# EAGLE board Stepper Driver jig middle (EAGLE 6.6.0)
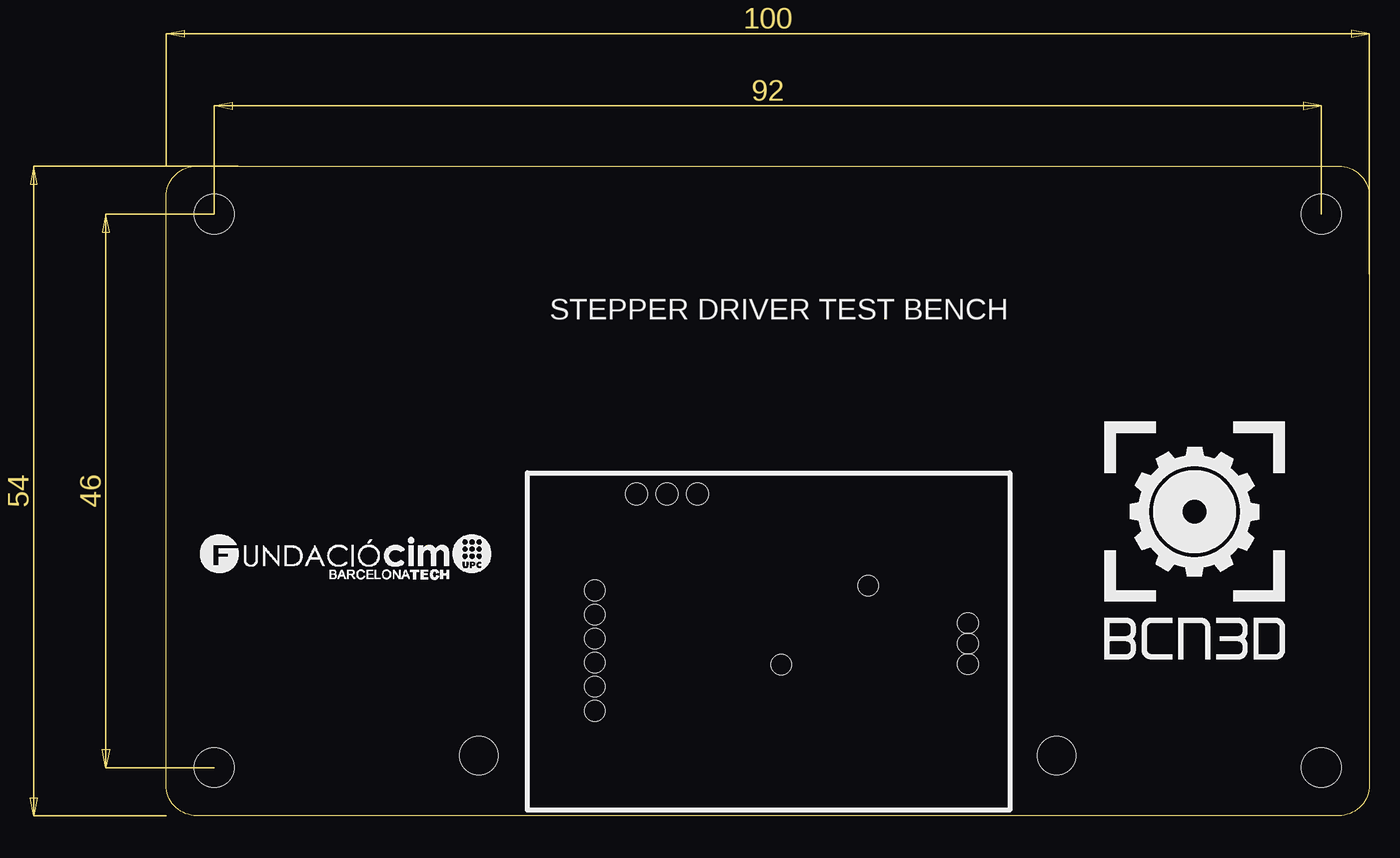
[diagram p0: board, top side]
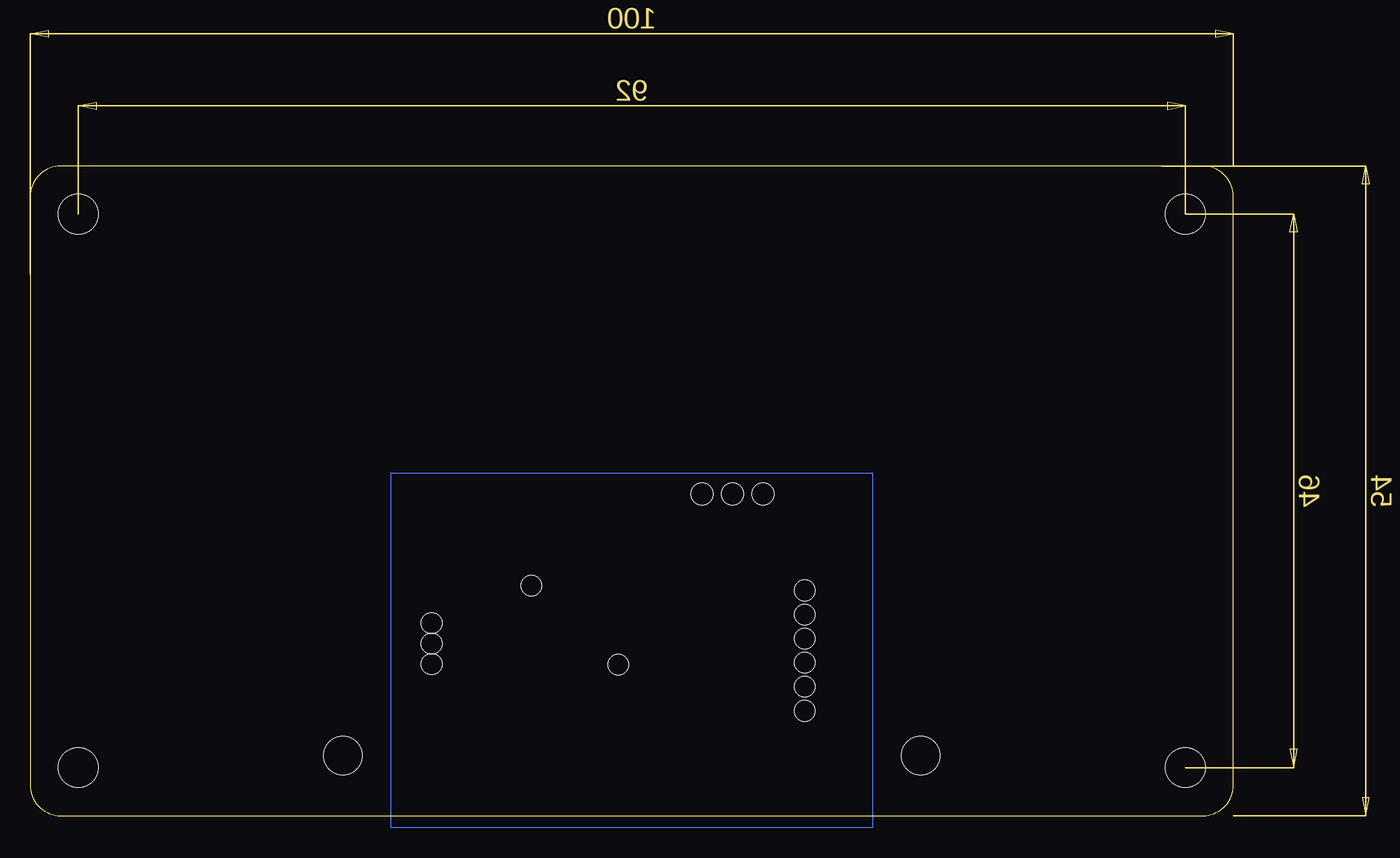
[diagram p1: board, bottom side, seen from below]

Size 100 x 54 mm. Coordinates in mm from the lower left corner, seen from the top.
Outline: 97.46,0 2.54,0 arc-90 0,2.54 0,51.46 arc-90 2.54,54 97.46,54 arc-90 100,51.46 100,2.54 arc-90 97.46,0
Copper layers (1*16): Top 0.035mm / dielectric 1.5mm / Bottom 0.035mm
Design rules "default": minimum track width 10mil, minimum drill 24mil, track to track 8mil, track to pad 8mil, pad to pad 8mil, via to via 8mil, smd to smd 8mil, copper to edge 40mil, drill to drill 8mil, minimum pad ring 10mil, minimum via ring 8mil, stop-mask expansion 4mil, vias tented up to drill 0mil, thermal gap 10mil
Holes 3.2 mm at 26,5 74,5
Holes 1.7 mm at 35.64,18.72 35.64,16.72 35.64,14.72 35.64,12.72 35.64,10.72 35.64,8.72 51.11,12.57 66.63,16.01 66.63,14.31 66.63,12.61 58.35,19.12
Holes 1.8 mm at 39.09,26.74 41.63,26.74 44.17,26.74

## Footprints (pad centres in the part's own frame; a part is rotated, then mirrored left to right if it is on the bottom)
STAND-OFF = hole 3.302: 0,0

## Placement (x,y rotation side)
E$1  [STAND-OFF]  4,4 0 top
E$2  [STAND-OFF]  96,4 0 top
E$3  [STAND-OFF]  96,50 0 top
E$4  [STAND-OFF]  4,50 0 top
E$5  [FCIM_LOGO]  1,16 0 top
E$6  [BCN3D_LOGO]  78,13 0 top

## Library data of the parts
E$1-E$4 = SparkFun-Electromechanical
E$5 E$6 = MarcEagleParts

## Tracks (layer width: path | path; a pad name or v marks a point on that pad's centre or on a via)
S$1
  Bottom 0: 30,-1 70,-1 70,28.5 30,28.5 30,-1

## Text on the board
tPlace: STEPPER DRIVER TEST BENCH